# Altium PCB motor_driver_pcb.PcbDoc
Units mm, origin at the board's own origin, x right, y up, seen from the top; angles counter-clockwise.
Board outline 68.33 x 61.98 mm, 2 copper layers (Top Layer, Bottom Layer); 25 components, 20 nets, 73 pads, 7 vias.
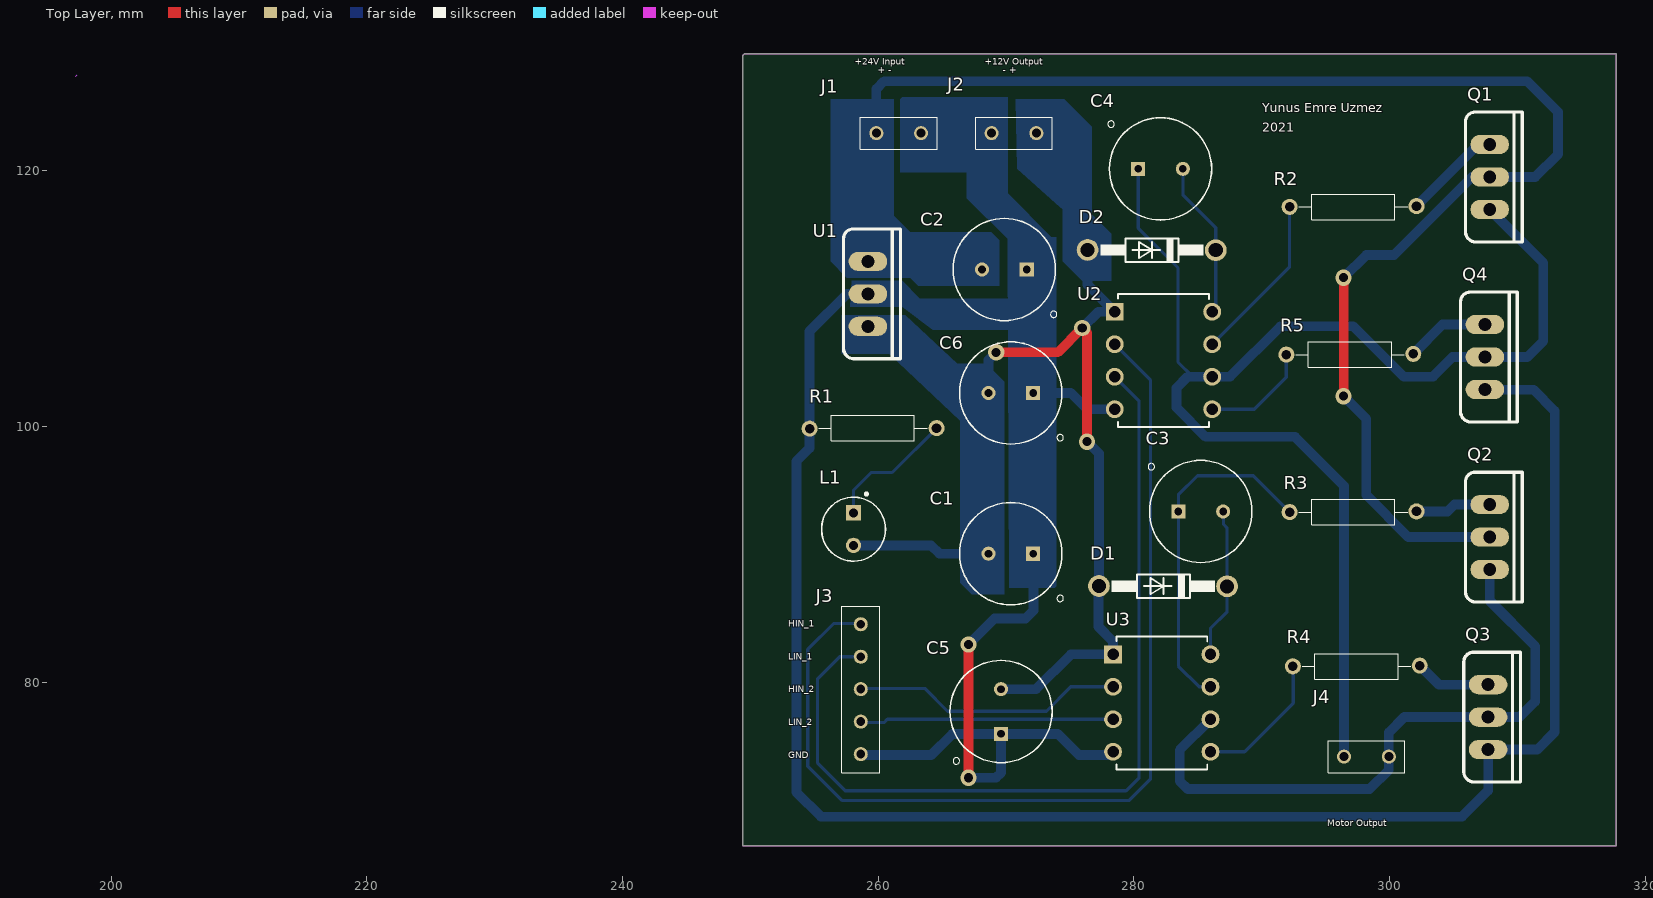
[diagram p0: Top Layer view]
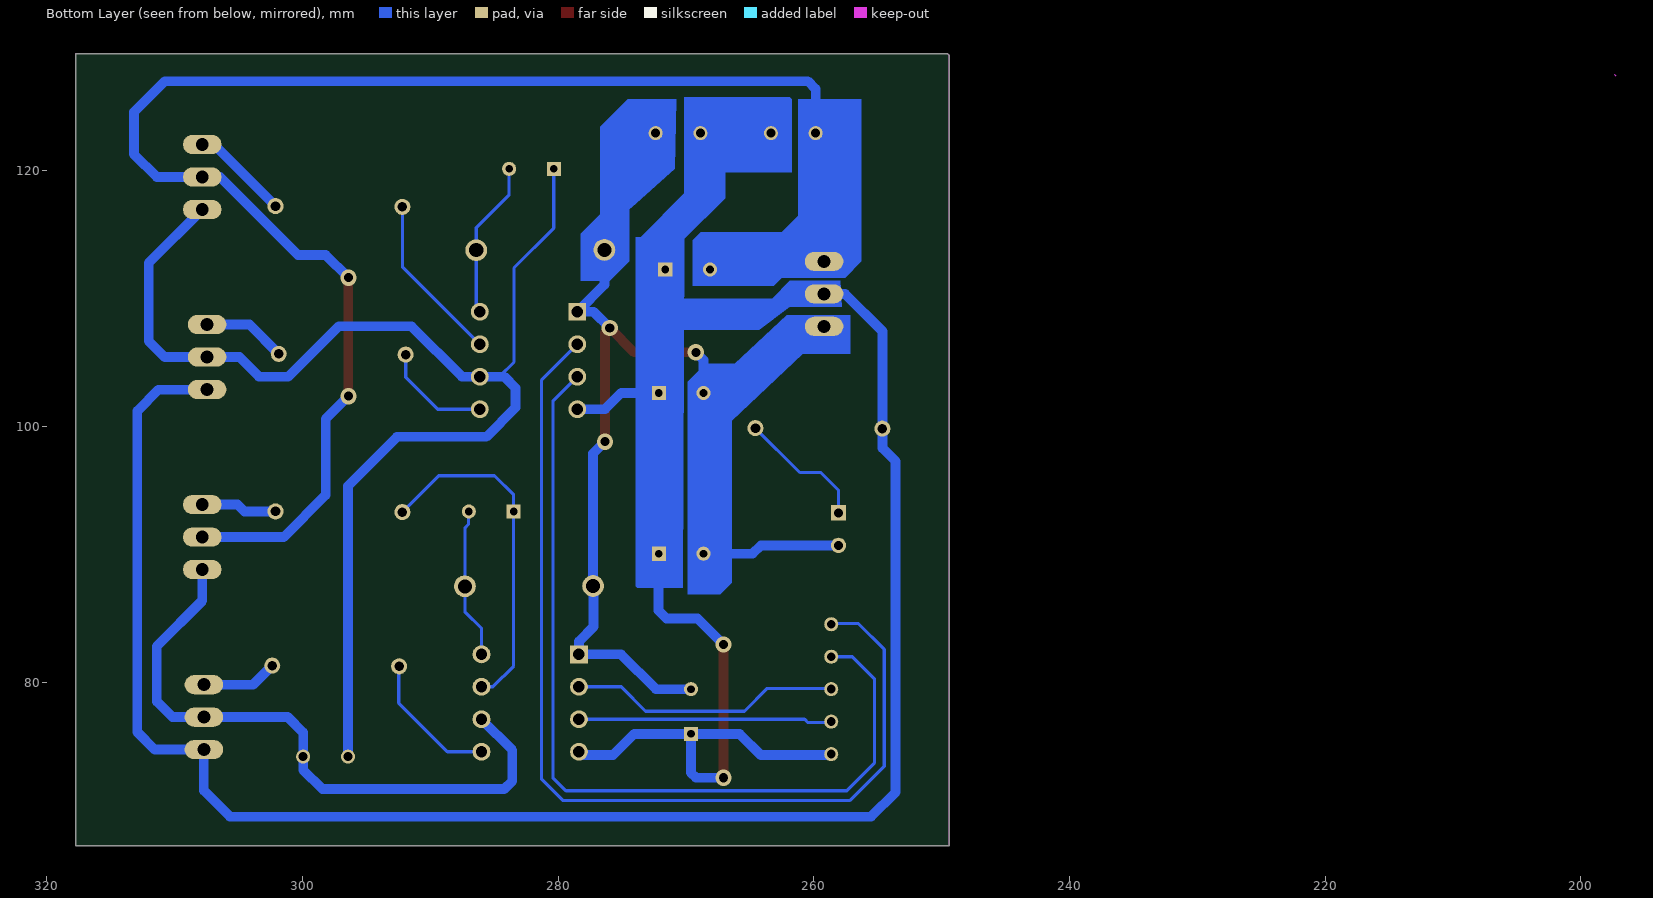
[diagram p1: Bottom Layer view, seen from below]
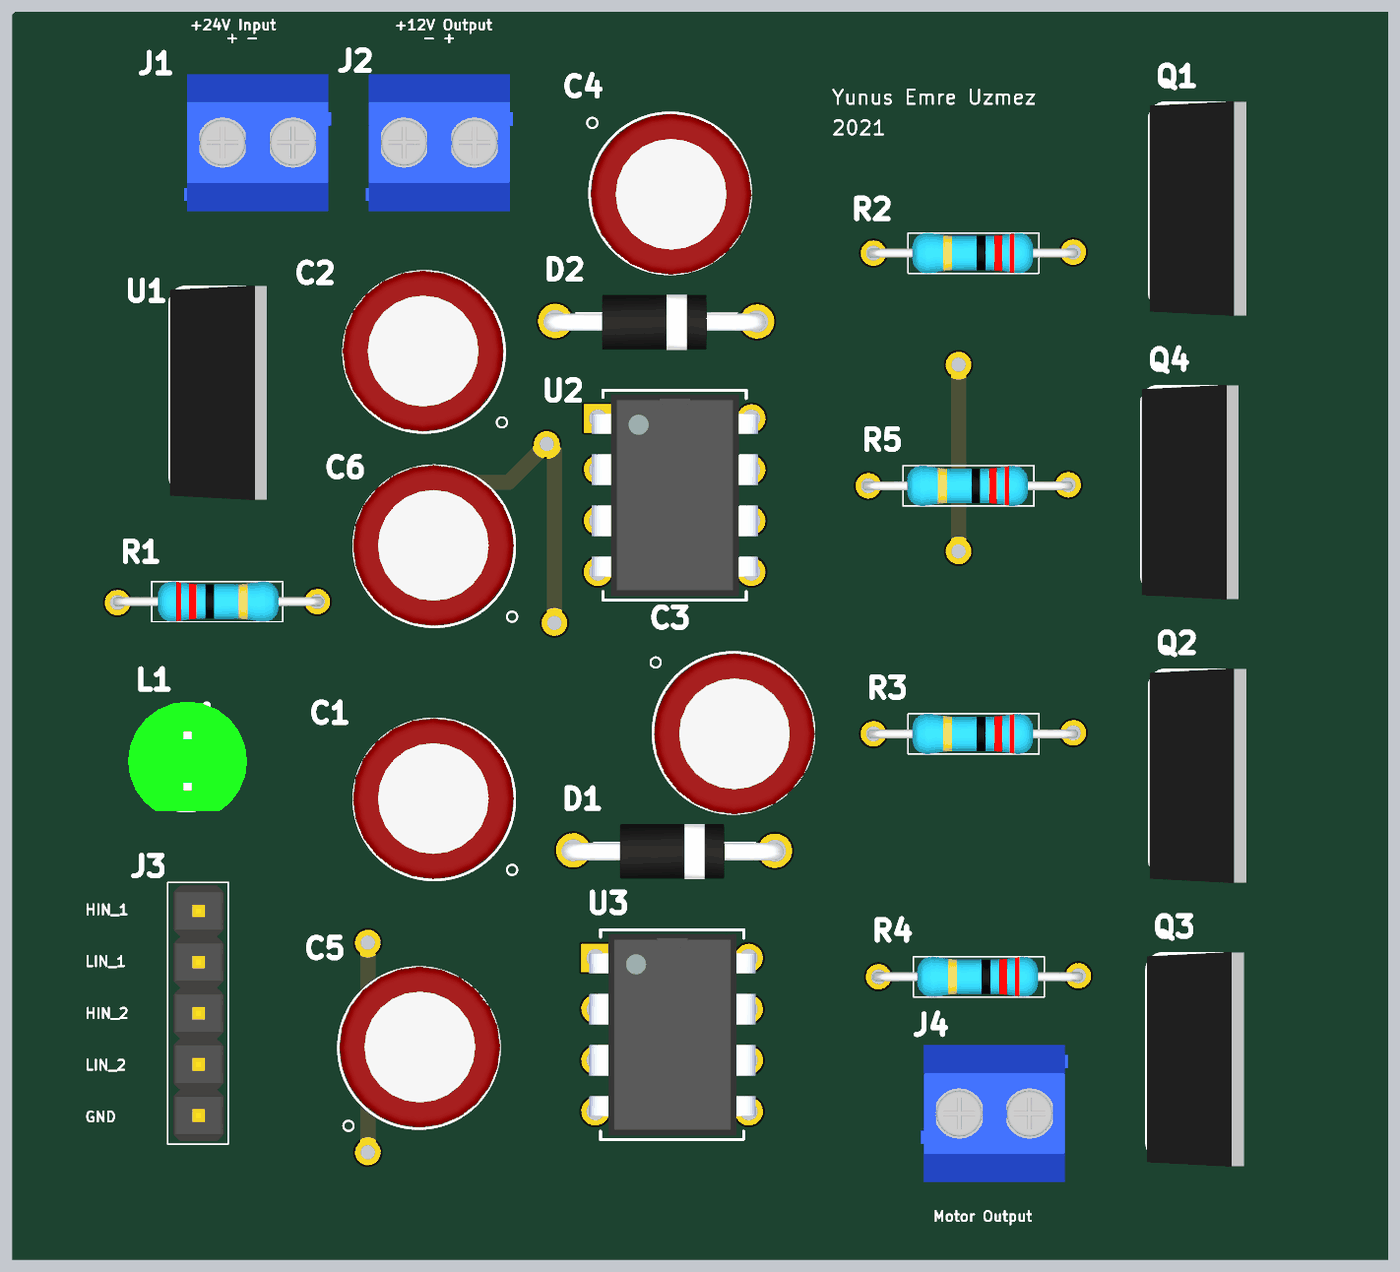
[diagram p2: 3D render of the assembled board from above, using the file's embedded part models]

## Layer stack, top to bottom
Top Solder: solder mask 0.0102, Solder Resist, Dk 3.5
Top Layer: signal copper 0.0356
Dielectric 1: dielectric 0.32, FR-4, Dk 4.8
Bottom Layer: signal copper 0.0356
Bottom Solder: solder mask 0.0102, Solder Resist, Dk 3.5

## Board outline
249.428,67.183 317.754,67.183 317.754,129.159 249.555,129.159 249.428,129.032

## Design rules (kind name [scope] priority, off if disabled: settings)
Clearance [All] p1: gap=0.254 ignorepadtopadclearanceinfootprint=FALSE except(0: Arc-Hole Track-Hole SMDPad-Hole THPad-Hole Via-Hole Fill-Hole Poly-Hole Region-Hole Text-Hole)
PolygonConnect [All] p1: connectstyle=Relief reliefconductorwidth=0.254 reliefentries=4 polygonreliefangle="90 Angle" airgapwidth=0.254
RoutingVias [All] p1: holewidth=0.711 width=1.27 viastyle="Through Hole" minholewidth=0.711 minwidth=1.27 maxholewidth=0.711 maxwidth=1.27
SolderMaskExpansion [All] p1: expansion=0.102
Width [All] p1: maxlimit=25.4 minlimit=0.254 preferedwidth=0.254 minimp=50.000000 maximp=50.000000 favimp=50.000000
30 further rules are at their usual default settings.

## Components (designator, comment, footprint, x,y, rotation, side; value= is the part's Value field where it differs from the comment)
C1 "Cap 0.1uF" "RADIAL CAPACITOR" 270.51,89.662 r180 top value=0.1uF
C2 "Cap 0.33uF" "RADIAL CAPACITOR" 270.002,111.887 r180 top value=0.33uF
C3 "Cap 1uF" "RADIAL CAPACITOR" 285.115,93.726 r0 top value=1uF
C4 "Cap 1uF" "RADIAL CAPACITOR" 281.968,120.523 r0 top value=1uF
C5 "Cap 1uF" "RADIAL CAPACITOR" 269.24,77.569 r90 top value=47uF
C6 "Cap 1uF" "RADIAL CAPACITOR" 270.51,102.235 r180 top value=47uF
D1 "1N5819" 1N5819 282.829,87.757 r0 top
D2 "1N5819" 1N5819 281.94,114.046 r0 top
J1 "Terminal Block 1x2" "TERMINAL BLOCK 1X2 3.5MM" 261.366,122.936 r180 top
J2 "Terminal Block 1x2" "TERMINAL BLOCK 1X2 3.5MM" 270.383,122.936 r180 top
J3 "Header 1x5" "HEADER 1X5 3.5MM" 258.699,78.867 r270 top
J4 "Terminal Block 1x2" "TERMINAL BLOCK 1X2 3.5MM" 298.45,74.168 r0 top
L1 "Led Green" "LED 5MM" 258.191,91.821 r270 top
Q1 "IRFZ44N" TO-220 307.975,119.634 r270 top
Q2 "IRFZ44N" TO-220 307.975,91.468 r270 top
Q3 "IRFZ44N" TO-220 307.848,77.385 r270 top
Q4 "IRFZ44N" TO-220 307.594,105.551 r270 top
R1 "Res 1k" "RESISTOR THT" 260.35,99.568 r180 top value=1k
R2 "Res 47r" "RESISTOR THT" 296.418,117.475 r0 top value=47r
R3 "Res 47r" "RESISTOR THT" 296.418,93.599 r0 top value=47r
R4 "Res 47r" "RESISTOR THT" 296.672,81.534 r0 top value=47r
R5 "Res 47r" "RESISTOR THT" 296.164,105.918 r0 top value=47r
U1 "L7812" TO-220 259.334,110.49 r270 top
U2 "IR2101" PDIP-8 281.432,106.553 r0 top
U3 "IR2101" PDIP-8 281.305,79.756 r0 top

## Footprints (in the part's own frame and the unit in brackets; to place one, negate y for a bottom-side part, rotate by r counter-clockwise, add the part's x,y. Pads: shape width x height; smd on the part's side, far side on the other; paste and mask are expansions set on the pad)
1N5819 [mm]
  round 1.7 hole 1.1: 1(-5.55,-0.241) 2(4.475,-0.265)
  silkscreen extent -4.55,-1.17 3.53,0.7, body extent -6.14,-1.67 4.89,1.07, height 3.43
"HEADER 1X5 3.5MM" [mm]
  round 1.1 hole 0.7: 1(-5.655,-0.051) 2(-3.115,-0.051) 3(-0.575,-0.051) 4(1.965,-0.051) 5(4.505,-0.051)
  silkscreen extent -7.05,-1.55 5.94,1.45, body extent -6.91,-1.29 5.79,1.25, height 9.5
"LED 5MM" [mm]
  round 1.208 hole 0.7: A(1.133,-0.11)
  rect 1.208x1.208 hole 0.7: C(-1.407,-0.11)
  silkscreen extent -2.99,-2.61 2.36,2.39, body extent -3.08,-3.01 2.37,2.89, height 12.04
PDIP-8 [mil]
  rect 55x55 hole 35: 1(-115,95)
  round 55 hole 35: 2(-115,-5) 3(-115,-105) 4(-115,-205) 5(185,-205) 6(185,-105) 7(185,-5) 8(185,95)
  silkscreen extent -105,-260 175,150, body extent -127,-252 198,142, height 201
"RADIAL CAPACITOR" [mm]
  rect 1.108x1.108 hole 0.6: NEG(-1.623,-0.381)
  round 1.108 hole 0.6: POS(1.877,-0.381)
  silkscreen extent -3.99,-4.38 4.13,3.62, body extent -3.83,-4.43 4.18,3.58, height 12.8
"RESISTOR THT" [mm]
  round 1.258 hole 0.75: 1(-4.225,-0.3) 2(5.7,-0.25)
  silkscreen extent -3.5,-1.3 5,0.7, body extent -4.52,-1.3 5.93,0.7, height 2.6
"TERMINAL BLOCK 1X2 3.5MM" [mm]
  round 1.1 hole 0.7: 1(-2,0) 1(-2,0) 2(1.5,0)
  silkscreen extent -3.25,-1.25 2.75,1.25, body extent -3.9,-3.13 3.4,3.68, height 8.4
TO-220 [mil]
  oval 59.37x118.74 hole 39.37: 1(-95,-5) 2(5,-5) 3(105,-5)
  silkscreen extent -195,-80 205,95, body extent -200,-82 220,108, height 975

## Part data
C1: "Aluminium Electrolytic Capacitor Radial Leaded  0.1uF 50V"
C2: "Aluminium Electrolytic Capacitor Radial Leaded  0.33uF 50V"
C3 C4 C5 C6: "Aluminium Electrolytic Capacitor Radial Leaded  1uF 50V"
D1 D2: "DIODE SCHOTTKY 1A 40V BULK", Name=1n5819
J1 J2 J4: "Fixed Terminal Block , screw type, 5.08 , horizontal, 2 poles, CUI Blue, slotted screw, PCB mount"
J3: "5 Pin (1x5) 2.54mm Male Pin Header THT"
L1: "HQG 5mm Led Green - 400-500 mcd", Name="Green Led"
Q1 Q2 Q3 Q4: "Designed for low voltage, high speed switching applications in / power supplies, converters and power motor controls, these / devices are particularly well suited for bridge circuits where / diode speed and commutating safe operating areas are critical / and offer additional safety margin against unexpected voltage / transients.", Name=IRFZ44N
R1: "Carbon Film Resistor Through Hole 1k"
R2 R3 R4 R5: "Carbon Film Resistor Through Hole 47r"
U1: "The L7800 series of three-terminal positive / regulators is available in TO-220 ISOWATT220 / TO-3 and D2PAK packages and several fixed / output voltages, making it useful in a wide range / of applications.These regulators can provide local / on-card regulation, eliminating the distribution / problems associated with single point regulation. / Each type employs internal current limiting, / thermal shut-down and safe area protection, / making it essentially indestructible. If adequate / heat sinking is provided, they can deliver over 1A / output current. Although designed primarily as / fixed voltage regulators, these devices can be / used with external components to obtain / adjustable voltages and currents.", Name=L7812
U2 U3: "The IR2101(S)/IR2102(S) are high voltage, high speed / power MOSFET and IGBT drivers with independent / high and low side referenced output channels. Proprietary HVIC and latch immune CMOS technologies / enable ruggedized monolithic construction. The logic / input is compatible with standard CMOS or LSTTL / output, down to 3.3V logic. The output drivers feature a high pulse current buffer stage designed for minimum / driver cross-conduction. The floating channel can be used to drive an N-channel power MOSFET or IGBT in / the high side configuration which operates up to 600 volts.", Name=IR2101

## Via types
v1: diameter 1.27, hole 0.711, Top Layer to Bottom Layer, 7 vias

## Nets (pads, with @x,y where several pads share a name; then routed paths per layer and width w, separated by ;. In a path a pad name is that pad's centre, name@x,y a point inside that pad or via, vN(x,y) a via of type N, cw(c..) or ccw(c..) an arc to the next point about the centre after c; other vN are vias at no path point)
+12V: C1.POS C5.POS C6.POS D1.1 D2.1 J2.1 L1.A U1.3 U2.1 U3.1 | length 67
  Top Layer w0.762: v1(269.24,105.791) 274.066,105.791 v1(275.971,107.696) 276.352,107.315 v1(276.352,98.806)
  Bottom Layer w0.762: L1.A 264.15,90.688 264.795,90.043 C1.POS ; C6.POS 268.633,105.184 v1(269.24,105.791) ; C5.POS 272.359,79.446 275.082,82.169 U3.1 278.384,83.185 277.241,84.328 277.241,87.478 D1.1 277.279,97.879 v1(276.352,98.806) ; v1(275.971,107.696) 277.241,108.966 U2.1 276.39,111.087 D2.1
+24V: C2.POS J1.2 Q1.2 Q2.2 U1.1 | length 111.2
  Top Layer w0.762: v1(296.418,102.362) v1(296.418,111.633)
  Bottom Layer w0.762: J1.2@259.866,122.809 259.866,126.389 260.477,127 310.769,127 313.182,124.587 313.182,121.285 311.404,119.507 Q1.2 306.451,119.507 300.355,113.411 298.196,113.411 v1(296.418,111.633) ; v1(296.418,102.362) 298.196,100.584 298.196,94.615 301.47,91.341 Q2.2 Q2.2@308.026,91.341
GND: C1.NEG C2.NEG C5.NEG C6.NEG J1.1 J2.2 J3.5 Q3.3 Q4.3 R1.2 U1.2 U2.4 U3.4 | length 193.9
  Top Layer w0.762: v1(267.081,72.517) v1(267.081,82.931)
  Bottom Layer w0.762: J3.5 258.715,74.295 264.16,74.295 265.811,75.946 C5.NEG ; U1.2 257.556,110.363 254.635,107.442 254.635,99.833 R1.2 254.635,99.803 254.635,98.298 253.619,97.282 253.619,71.374 255.524,69.469 305.689,69.469 307.721,71.501 Q3.3 311.573,74.718 312.928,76.073 312.928,101.219 311.277,102.87 307.481,102.87 Q4.3 ; v1(267.081,72.517) 269.24,72.517 269.621,72.898 C5.NEG ; v1(267.081,82.931) 269.113,84.963 271.526,84.963 272.161,85.598 272.161,90.015 C1.NEG C1.NEG@271.907,89.817 ; 271.78,108.077 271.907,107.95 ; C6.NEG 275.082,102.616 276.352,101.346 U2.4 U2.4@278.384,101.473 ; U3.4 278.13,74.295 275.717,74.295 274.066,75.946 C5.NEG
HIN_1: J3.1 U2.2 | length 77.9
  Bottom Layer w0.254: J3.1 258.588,84.582 256.54,84.582 254.508,82.55 254.508,73.406 257.175,70.739 279.654,70.739 281.305,72.39 281.305,103.632 U2.2
HIN_2: J3.3 U3.2 | length 21.3
  Bottom Layer w0.254: J3.3 258.708,79.502 263.652,79.502 265.43,77.724 273.177,77.724 275.082,79.629 U3.2
LIN_1: J3.2 U2.3 | length 69.3
  Bottom Layer w0.254: J3.2 256.988,81.982 255.27,80.264 255.27,73.66 257.429,71.501 279.4,71.501 280.416,72.517 280.416,101.981 U2.3
LIN_2: J3.4 U3.3 | length 19.9
  Bottom Layer w0.254: J3.4 258.715,76.835 260.477,76.835 260.731,77.089 U3.3
NetC3_NEG: C3.NEG R3.1 U3.7 | length 27.1
  Bottom Layer w0.254: U3.7 285.115,79.629 283.492,81.252 C3.NEG 283.492,94.643 284.988,96.139 289.353,96.139 R3.1
NetC3_POS: C3.POS D1.2 U3.8 | length 11.8
  Bottom Layer w0.254: U3.8 286.004,84.201 287.304,85.501 D1.2 287.304,92.045 287.02,92.329 287.02,93.317 C3.POS
NetC4_NEG: C4.NEG J4.1 Q1.3 Q4.2 U2.6 | length 101.9
  Bottom Layer w0.254: C4.NEG 280.345,115.514 283.464,112.395 283.464,105.029 284.607,103.886
  Bottom Layer w0.762: J4.1@296.45,74.168 296.45,95.345 292.608,99.187 285.623,99.187 283.337,101.473 283.337,102.997 284.226,103.886 284.607,103.886 U2.6 287.528,103.886 291.465,107.823 297.18,107.823 301.117,103.886 303.403,103.886 304.941,105.424 Q4.2 310.783,105.424 312.039,106.68 312.039,112.776 Q1.3
NetC4_POS: C4.POS D2.2 U2.8 | length 12.4
  Bottom Layer w0.254: C4.POS 283.845,118.11 286.415,115.54 D2.2 286.415,109.25 U2.8
NetJ4_2: J4.2 Q2.3 Q3.2 U3.6 | length 50.2
  Bottom Layer w0.762: U3.6 283.591,74.676 283.591,72.263 284.226,71.628 298.45,71.628 299.95,73.128 J4.2 299.95,76.049 301.159,77.258 Q3.2 310.176,77.258 311.404,78.486 311.404,82.804 307.848,86.36 Q2.3
NetL1_C: L1.C R1.1 | length 10.3
  Bottom Layer w0.254: L1.C 258.081,95.013 259.461,96.393 261.1,96.393 R1.1
NetQ1_1: Q1.1 R2.2 | length 7.7
  Bottom Layer w0.762: R2.2 306.94,122.047 Q1.1
NetQ2_1: Q2.1 R3.2 | length 6
  Bottom Layer w0.762: R3.2 304.55,93.349 305.082,93.881 Q2.1
NetQ3_1: Q3.1 R4.2 | length 6
  Bottom Layer w0.762: R4.2 303.858,79.798 Q3.1
NetQ4_1: Q4.1 R5.2 | length 6.6
  Bottom Layer w0.762: R5.2 304.16,107.964 Q4.1
NetR2_1: R2.1 U2.7 | length 13.3
  Bottom Layer w0.254: U2.7 292.193,112.488 R2.1
NetR4_1: R4.1 U3.5 | length 10.9
  Bottom Layer w0.254: U3.5 288.671,74.549 292.481,78.359 292.481,81.2 R4.1
NetR5_1: R5.1 U2.5 | length 8.6
  Bottom Layer w0.254: U2.5 289.433,101.346 291.939,103.852 R5.1

## Keep-outs
Keep-Out Layer:
  lines w0.07: 197.231,127.381 197.358,127.508 ; 249.428,67.183 317.754,67.183 317.754,129.159 249.555,129.159 249.428,129.032 249.428,127.508 249.428,67.183

## Other copper
Bottom Layer:
  region net GND: 266.954,123.698 270.129,123.698 270.129,118.237 273.558,114.808 270.256,114.808 270.129,114.681 266.954,117.856
  region net +12V: 270.764,125.603 274.574,125.603 276.733,123.444 276.733,116.586 278.257,115.062 278.257,111.379 275.971,111.379 274.447,112.903 274.447,116.967 274.256,117.157 270.891,120.142
  region net GND: 257.937,111.379 261.874,111.379 263.271,109.982 273.939,109.982 273.939,107.569 264.287,107.569 261.874,109.347 257.81,109.347
  region net +12V: 257.175,108.712 262.128,108.712 266.192,104.902 268.478,104.902 269.875,103.505 269.875,86.868 267.335,86.868 266.446,87.757 266.446,100.457 260.858,105.664 257.175,105.664
  region net GND: 270.129,114.681 270.256,114.808 273.939,114.808 273.939,87.503 273.812,87.376 270.256,87.376
  region net GND: 261.747,125.603 261.874,125.73 270.129,125.73 270.129,119.888 261.747,119.888
  region: 264.287,109.728
  region net +24V: 262.509,115.189 268.859,115.189 269.494,114.554 269.494,110.998 263.144,110.998 262.509,111.633
  region net +24V: 256.286,125.603 261.239,125.603 261.239,116.459 262.509,115.189 262.509,111.633 257.556,111.633 256.286,112.903
  region net +12V: 281.559,121.031
  region: 250.19,119.888

## Silkscreen, mask and mechanical layers (free items; w line width, h text height)
Top Overlay:
  text "+24V Input" at 258.191,128.27 h0.5
  text "+12V Output" at 268.351,128.27 h0.5
  text "+ -" at 259.969,127.635 h0.5
  text "- +" at 269.748,127.635 h0.5
  text "Yunus Emre Uzmez" at 290.068,124.587 h0.7
  text "2021" at 290.068,123.063 h0.7
  text "HIN_1" at 252.984,84.328 h0.5
  text "LIN_1" at 252.984,81.756 h0.5
  text "HIN_2" at 252.984,79.184 h0.5
  text "LIN_2" at 252.984,76.613 h0.5
  text "GND" at 252.984,74.041 h0.5
  text "Motor Output" at 295.148,68.707 h0.5